# EAGLE board DickbuttDeauth (EAGLE 9.0.0)
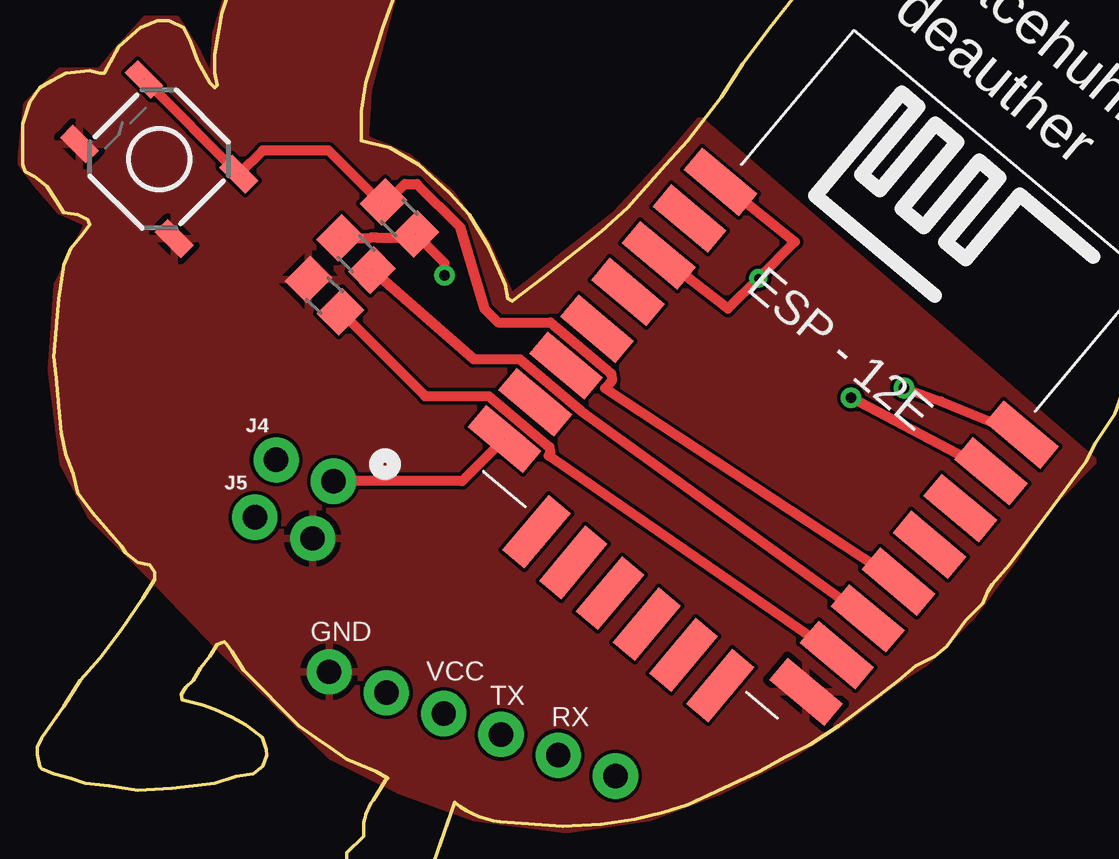
[diagram p0: board, top side]
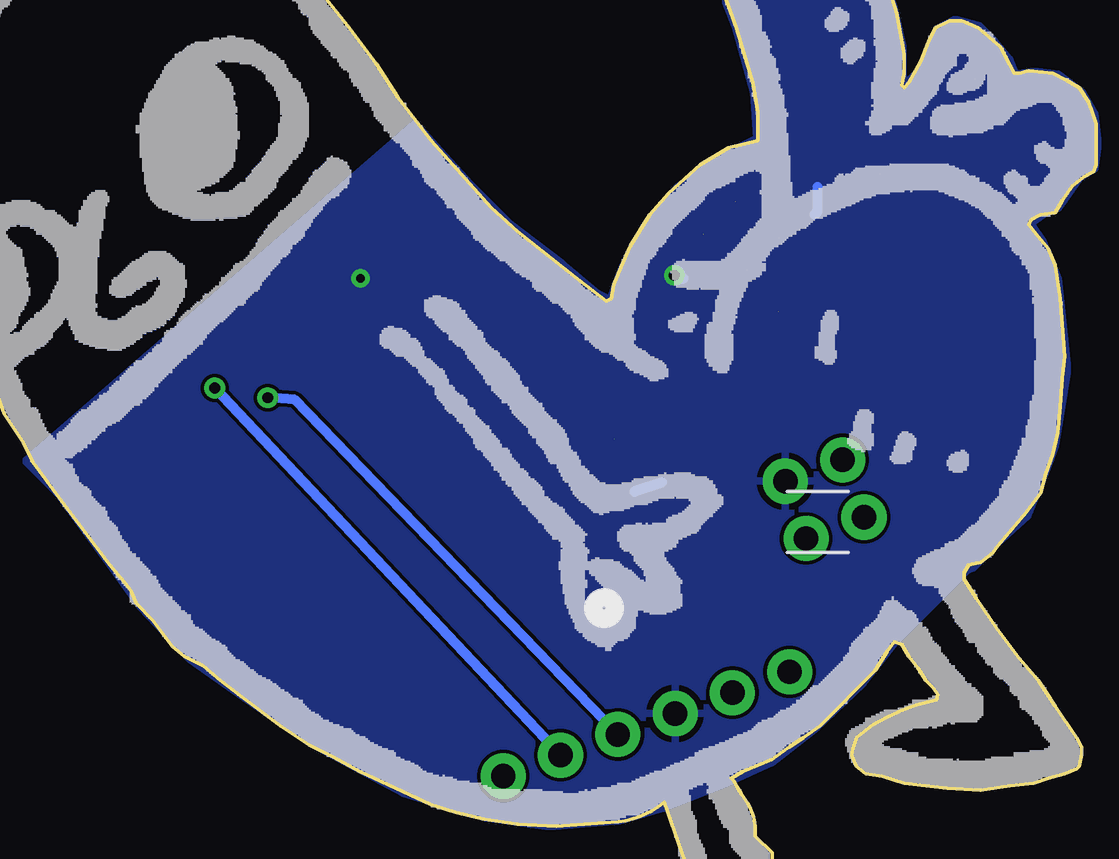
[diagram p1: board, bottom side, seen from below]

No outline drawn. Coordinates in mm, seen from the top.
Copper layers (1*16): Top 0.035mm / dielectric 1.5mm / Bottom 0.035mm
Design rules "default": minimum track width 6mil, minimum drill 0.35mm, track to track 6mil, track to pad 6mil, pad to pad 6mil, via to via 6mil, smd to smd 6mil, copper to edge 40mil, drill to drill 6mil, minimum pad ring 10mil, minimum via ring 8mil, stop-mask expansion 4mil, vias tented up to drill 0mil, thermal gap 10mil
Milling: 210 lines

## Footprints (pad centres in the part's own frame; a part is rotated, then mirrored left to right if it is on the bottom)
1X06_NO_SILK = drill 1.016 pad 1.88: 1 0,0; 2 2.54,0; 3 5.08,0; 4 7.62,0; 5 10.16,0; 6 12.7,0
1X01NS_KIT = drill 1.016 pad 1.88: 1 0,0
R0805 = smd 1.3 x 1.5: 1 -0.95,0; 2 0.95,0
TACTILE_SWITCH_SMD_5.2MM = smd 1.524 x 0.762: 1 -2.794,1.905; 2 2.794,1.905; 3 -2.794,-1.905; 4 2.794,-1.905
ESP12E-SMD = smd 3 x 1.2: ADC -8.3,3.8; CH_PD -8.3,1.8; GND 8.1,-8.2; GPIO0 8.1,-2.2; GPIO2 8.1,-4.2; GPIO4 8.1,-0.2; GPIO5 8.1,1.8; GPIO12 -8.3,-4.2; GPIO13 -8.3,-6.2; GPIO14 -8.3,-2.2; GPIO15 8.1,-6.2; GPIO16 -8.3,-0.2; RESET -8.3,5.8; RXD0 8.1,3.8; TXD0 8.1,5.8; VCC -8.3,-8.2 | smd 1.2 x 3: CS0 -4.8,-10.3; GPIO9 -0.8,-10.3; GPIO10 1.2,-10.3; MISO -2.8,-10.3; MOSI 3.2,-10.3; SCLK 5.2,-10.3

## Placement (x,y rotation side)
J1  [1X06_NO_SILK]  28.34,11 20 bottom
J2  [1X01NS_KIT]  16.59,23.29 20 bottom
J3  [1X01NS_KIT]  15.72,20.91 20 bottom
J4  [1X01NS_KIT]  14.2,24.18 0 top
J5  [1X01NS_KIT]  13.31,21.79 0 top
R1  10k  [R0805]  19.34,34.27 315 top
R2  10k  [R0805]  16.21,31.03 315 top
R3  10k  [R0805]  17.53,32.77 315 top
S1  [TACTILE_SWITCH_SMD_5.2MM]  9.32,36.72 135 top
U1  [ESP12E-SMD]  35.34,26 320 top

## Library data of the parts
J1-J5 = SparkFun-Connectors
R1-R3 = resistor
S1 = SparkFun-Switches; PROD_ID: SWCH-08247; SF_SKU: COM-08720
U1 = esp8266modules

## Nets
GND: J1.6 J3.1 R2.1 S1.1 S1.2 U1.GND
N$1: R3.2 U1.GPIO2
N$3: R2.2 U1.GPIO15
N$5: R1.1 S1.3 S1.4 U1.GPIO0
RX: J1.2 U1.TXD0
TX: J1.3 U1.RXD0
VCC: J1.4 J2.1 R1.2 R3.1 U1.CH_PD U1.RESET U1.VCC

## Tracks (layer width: path | path; a pad name or v marks a point on that pad's centre or on a via)
GND
  pour Top: 48.26,24.13 46.61,22.48 46.48,22.48 44.96,20.07 43.18,17.65 41.27,15.75 39.88,14.86 37.72,13.21 35.56,11.81 32.77,10.41 29.72,9.27 26.29,8.76 22.48,9.27 19.3,10.41 16.51,11.81 11.81,16.38 8.89,19.43 6.48,21.84 5.33,24 4.83,27.94 5.08,31.5 6.35,34.04 5.21,34.54 4.32,35.56 3.56,36.58 3.81,38.99 5.21,40.39 6.86,40.39 7.37,41.02 8.76,42.55 10.03,42.55 10.92,41.15 11.56,39.88 11.68,41.91 12.57,44.96 14.61,47.88 16.13,49.15 18.03,49.4 19.43,48.9 20.32,47.75 20.19,46.35 19.68,44.83 18.92,43.05 18.03,39.62 17.91,37.59 19.68,36.83 21.46,35.31 22.99,33.15 24,30.99 25.91,32.51 28.32,34.42 30.35,36.58 31.88,38.35
N$1  (1 unrouted)
  Top 0.406: U1.GPIO2 26.87,26.25 26.87,26.26 24.35,28.38 22.42,28.38 R3.2
N$3  (1 unrouted)
  Top 0.406: U1.GPIO15 25.55,24.36 25.61,24.43 25.59,24.73 23.06,26.84 20.4,26.84 R2.2
N$5  (3 unrouted)
  Top 0.406: U1.GPIO0 27.91,27.17 28.18,27.5 28.16,27.79 25.63,29.91 23.45,29.91 22.87,30.48 21.84,33.91 20.07,35.69 19.56,35.69 18.81,34.94 R1.1 18.52,34.94 16.38,37.08 13.63,37.08 S1.3 S1.4
RX  (via drill 0.45)
  Top 0.406: v40.36,27.18 41.91,26.62 U1.TXD0
  Bottom 0.406: J1.2 v40.36,27.18
TX  (via drill 0.45)
  Top 0.406: v38.15,26.77 U1.RXD0
  Bottom 0.406: J1.3 37.03,26.7 v38.15,26.77
VCC  (via drill 0.35, 0.45)  (3 unrouted)
  Top 0.406: R1.2 19.92,33.69 | R1.2 19.85,33.44 18.42,33.44 18.12,33.44 R3.1 16.35,33.44 | 16.64,23.24 J2.1 21.95,23.29 U1.VCC | R1.2 21.21,32.4 v21.21,31.88 | U1.RESET 35.81,33.27 v34.29,31.75 33.02,30.48 U1.CH_PD
  Bottom 0.406: 21.72,23.24 22.86,22.86 | 15.37,34.42 15.24,34.54 15.24,35.56 | v21.21,31.88 21.08,31.75 20.83,31.75
  pour Bottom: 48.26,24.13 32,38.23 30.99,37.08 29.72,35.69 28.07,34.04 25.91,32.38 24.38,31.11 23.88,30.86 23.37,32.26 22.48,33.91 21.08,35.56 19.3,36.83 17.78,37.59 17.91,39.5 18.67,42.29 19.56,44.58 20.19,46.35 20.45,47.62 20.07,48.26 18.67,49.28 17.78,49.4 15.88,48.9 14.73,47.88 13.59,46.61 12.83,45.21 12.06,43.05 11.68,41.4 11.68,39.75 11.05,40.39 10.29,42.16 9.53,42.55 8.51,42.29 7.87,41.66 7.24,40.89 6.99,40.26 6.22,40.39 5.21,40.26 4.19,39.5 3.68,38.61 3.56,37.34 3.68,36.32 4.32,35.94 4.95,35.05 5.21,34.67 5.84,34.42 6.35,34.04 5.84,33.27 5.21,31.75 4.83,27.94 5.08,26.29 5.33,24.77 5.97,23.11 6.48,21.84 7.75,20.7 8.76,19.68 9.02,19.56 11.94,16.64 13.34,14.86 15.37,12.95 17.14,11.56 18.8,10.79 21.72,9.65 23.5,9.14 26.42,8.89 29.08,9.27 32.51,10.29 36.32,12.32 39.62,14.61 41.4,15.88 43.43,18.03 44.7,19.81 46.86,22.73

## Text on the board
tPlace: spacehuhn / deauther | GND | VCC | TX | RX